# EAGLE board brd (EAGLE 8.3.2)
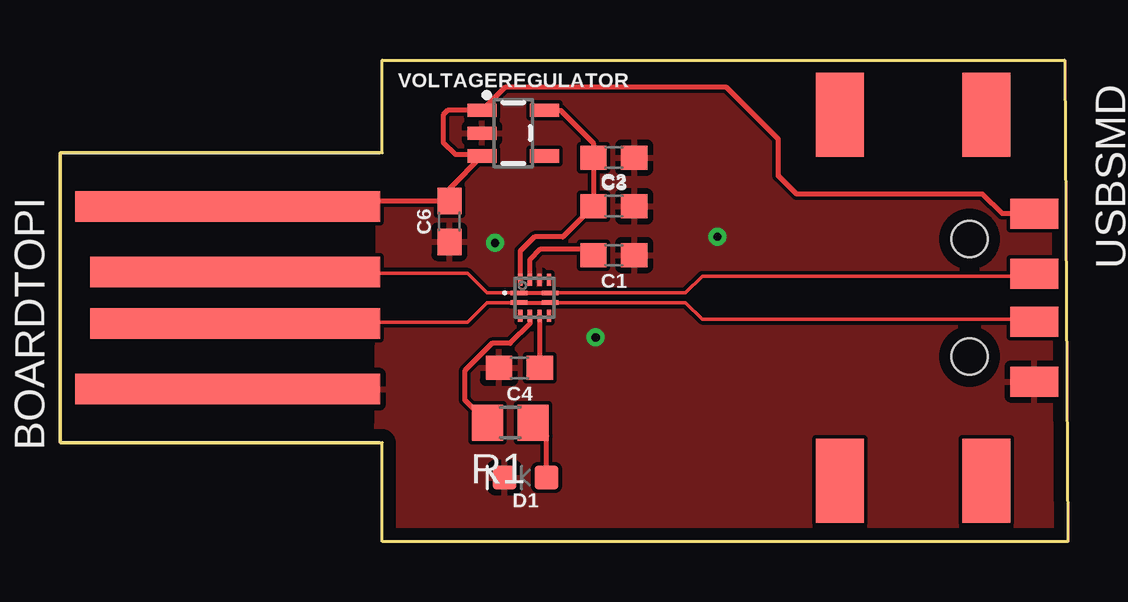
[diagram p0: board, top side]
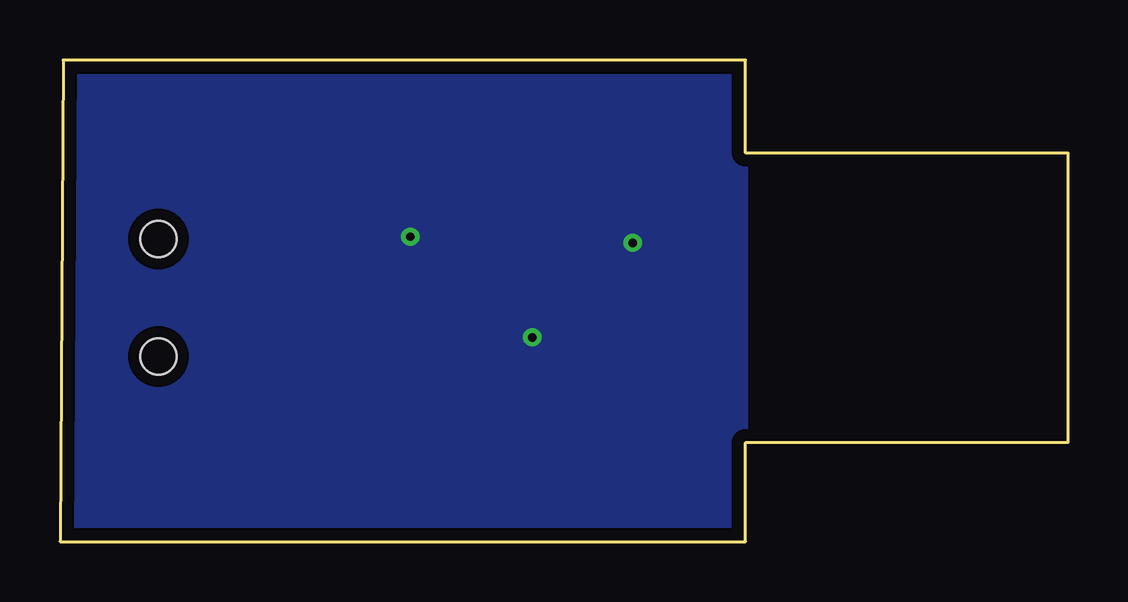
[diagram p1: board, bottom side, seen from below]

Size 42.01 x 20.07 mm. Coordinates in mm from the lower left corner, seen from the top.
Outline: 13.44,0 13.44,4.13 0,4.13 0,16.19 13.44,16.19 13.44,20.07 41.88,20.07 42.01,0 13.44,0
Copper layers (1*16): Top 0.035mm / dielectric 1.5mm / Bottom 0.035mm
Design rules "default *": minimum track width 6mil, minimum drill 0.35mm, track to track 6mil, track to pad 6mil, pad to pad 6mil, via to via 6mil, smd to smd 6mil, copper to edge 20mil, drill to drill 6mil, minimum pad ring 10mil, minimum via ring 8mil, stop-mask expansion 4mil, vias tented up to drill 0mil, thermal gap 10mil

## Footprints (pad centres in the part's own frame; a part is rotated, then mirrored left to right if it is on the bottom)
USBPCB = smd 1.27 x 12.7: 1 3.81,5.08; 4 -3.81,5.08 | smd 1.27 x 12.065: 2 1.079,4.763; 3 -1.079,4.763
0603 = smd 1.1 x 1: 1 -0.85,0; 2 0.85,0
LED-0603 = smd 1 x 1: A -0.877,0; C 0.877,0
R0805 = smd 1.3 x 1.5: 1 -0.95,0; 2 0.95,0
RWB0012A = smd 0.7 x 0.175: 1 -0.65,0.2; 2 -0.65,-0.2; 7 0.65,-0.2; 8 0.65,0.2 | smd 0.175 x 0.5: 3 -0.6,-0.75; 4 -0.2,-0.75; 5 0.2,-0.75; 6 0.6,-0.75; 9 0.6,0.75; 10 0.2,0.75; 11 -0.2,0.75; 12 -0.6,0.75
USBSMD = smd 1.25 x 2: P$1 -3.5,0; P$2 -1,0; P$3 1,0; P$4 3.5,0 | smd 3.5 x 2: P$5 7.625,-2; P$6 7.625,-8.1; P$7 -7.625,-8.1; P$8 -7.625,-2 | hole 1.5: -2.45,-2.7; 2.45,-2.7
SOT23-5 = smd 0.55 x 1.2: 1 -0.95,-1.3; 2 0,-1.3; 3 0.95,-1.3; 4 0.95,1.3; 5 -0.95,1.3

## Placement (x,y rotation side)
BOARDTOPI  USBPCB  [USBPCB]  12.07,10.16 90 top
C1  0.1uF  [0603]  23.09,11.94 180 top
C2  1.0uF  [0603]  23.09,13.97 0 top
C3  10nF  [0603]  23.09,16 180 top
C4  0.1uF  [0603]  19.15,7.24 180 top
C6  1.0uF  [0603]  16.23,13.34 90 top
D1  Red  [LED-0603]  19.41,2.67 180 top
R1  120  [R0805]  18.77,4.95 180 top
U1  Value  [RWB0012A]  19.79,10.16 0 top
USBSMD  USB  [USBSMD]  40.61,10.16 270 top
VOLTAGEREGULATOR  INA169  [SOT23-5]  18.9,17.02 270 top

## Library data of the parts
BOARDTOPI = USBPCB
C1 C4 = SparkFun-Capacitors; PROD_ID: CAP-00810
C2 C6 = SparkFun-Capacitors; PROD_ID: CAP-00868
C3 = SparkFun-Capacitors; PROD_ID: CAP-00867
D1 = SparkFun-LED; PROD_ID: DIO-11154
R1 = rcl
U1 = TUSB211; COMPTYPE: IC; MANUFACTURER: Texas Instruments; MOUNTTYPE: SMT; PACKAGEREFERENCE: RWB0012A; PARTNUMBER: TUSB211QRWBR; PIN_COUNT: 12; REFDES: RefDes; ROHS: Y; TYPE: TYPE
USBSMD = USBSMD
VOLTAGEREGULATOR = SparkFun-IC-Special-Function; PROD_ID: IC-11776

## Nets
3.3V: C2.1 C3.2 U1.12 VOLTAGEREGULATOR.5
EQ: U1.6
GND: BOARDTOPI.4 C1.1 C2.2 C3.1 C4.2 C6.1 D1.C U1.10 USBSMD.P$4 VOLTAGEREGULATOR.2
M: BOARDTOPI.2 U1.1 U1.8 USBSMD.P$2
N$1: C1.2 U1.11
N$2: D1.A R1.1
N$3: R1.2 U1.4
N$4: C4.1 U1.5
NC/ADJ: VOLTAGEREGULATOR.4
P: BOARDTOPI.3 U1.2 U1.7 USBSMD.P$3
VIN: BOARDTOPI.1 C6.2 USBSMD.P$1 VOLTAGEREGULATOR.1 VOLTAGEREGULATOR.3

## Tracks (layer width: path | path; a pad name or v marks a point on that pad's centre or on a via)
3.3V
  Top 0.203: VOLTAGEREGULATOR.5 20.87,17.97 22.24,16.6 C3.2 C2.1 20.97,12.7 19.79,12.7 19.19,12.1 U1.12
GND  (via drill 0.35)
  other vias: 18.14,12.45 22.33,8.51 27.41,12.7
  pour Top: 13.18,0 13.31,19.68 41.88,19.68 42.01,0
  pour Bottom: 13.44,20.32 13.44,0 41.38,0 42.65,0 42.65,19.05 42.65,20.32
M
  Top 0.152: U1.1 17.81,10.36 16.99,11.18 7.37,11.18 BOARDTOPI.2 | U1.8 26.08,10.36 26.77,11.05 40.5,11.05 USBSMD.P$2
  Top 0.175: U1.1 U1.8
N$1
  Top 0.203: U1.11 19.59,11.74 20.04,12.19 21.98,12.19 C1.2
N$2
  Top 0.203: D1.A 20.28,4.39 R1.1
N$3
  Top 0.203: U1.4 19.59,9.07 18.77,8.26 18.01,8.26 16.87,7.11 16.87,5.91 R1.2
N$4
  Top 0.203: C4.1 20,9.39 U1.5
P
  Top 0.152: U1.2 17.81,9.96 16.99,9.14 7.37,9.14 BOARDTOPI.3 | U1.7 26.08,9.96 26.77,9.27 40.5,9.27 USBSMD.P$3
  Top 0.175: U1.2 U1.7
VIN
  Top 0.203: BOARDTOPI.1 10.9,13.97 11.11,14.19 C6.2 16.23,14.7 VOLTAGEREGULATOR.3 17.54,16.13 16.48,16.13 15.98,16.64 15.98,17.78 16.16,17.97 VOLTAGEREGULATOR.1 18.55,18.92 27.79,18.92 29.95,16.76 29.95,15.24 30.71,14.48 38.46,14.48 39.27,13.66 USBSMD.P$1